# EAGLE board Tock (EAGLE 7.2.0)
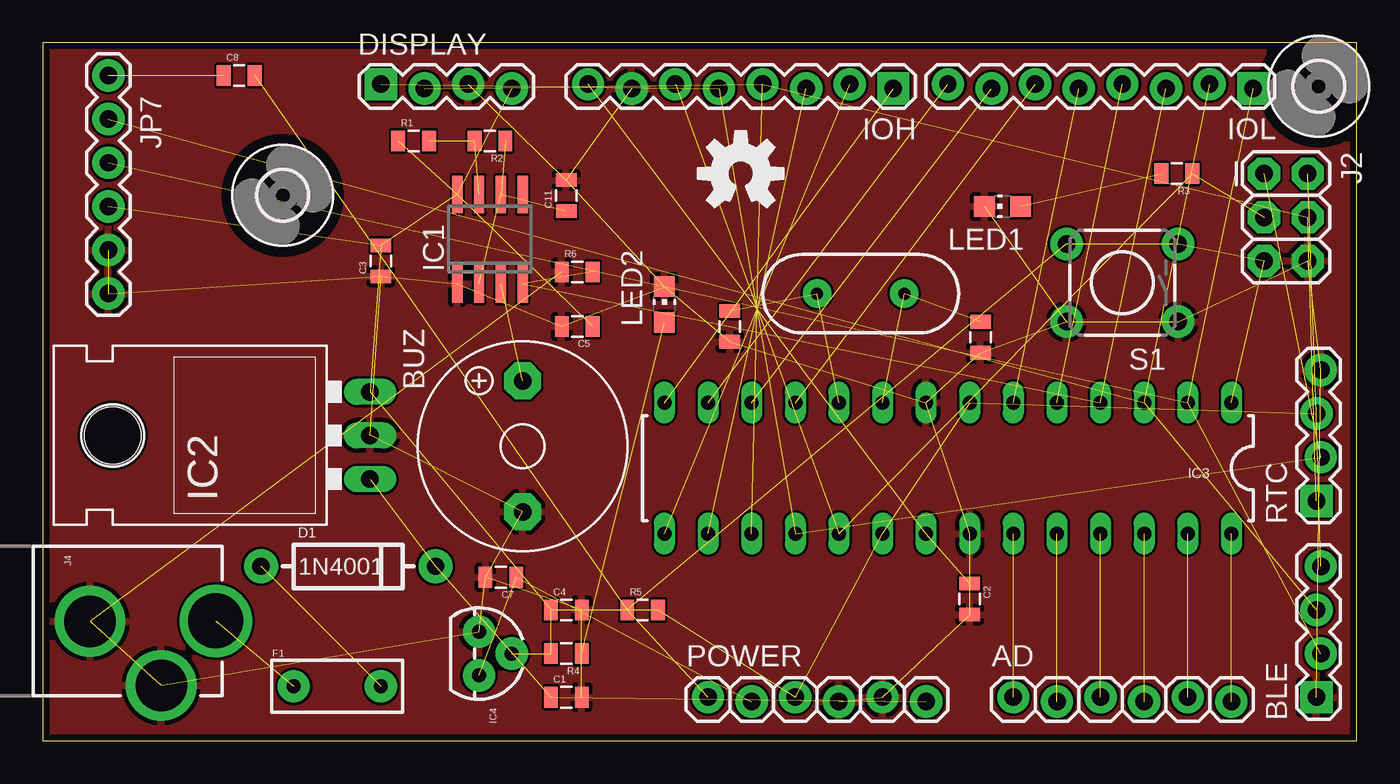
[diagram p0: board, top side]
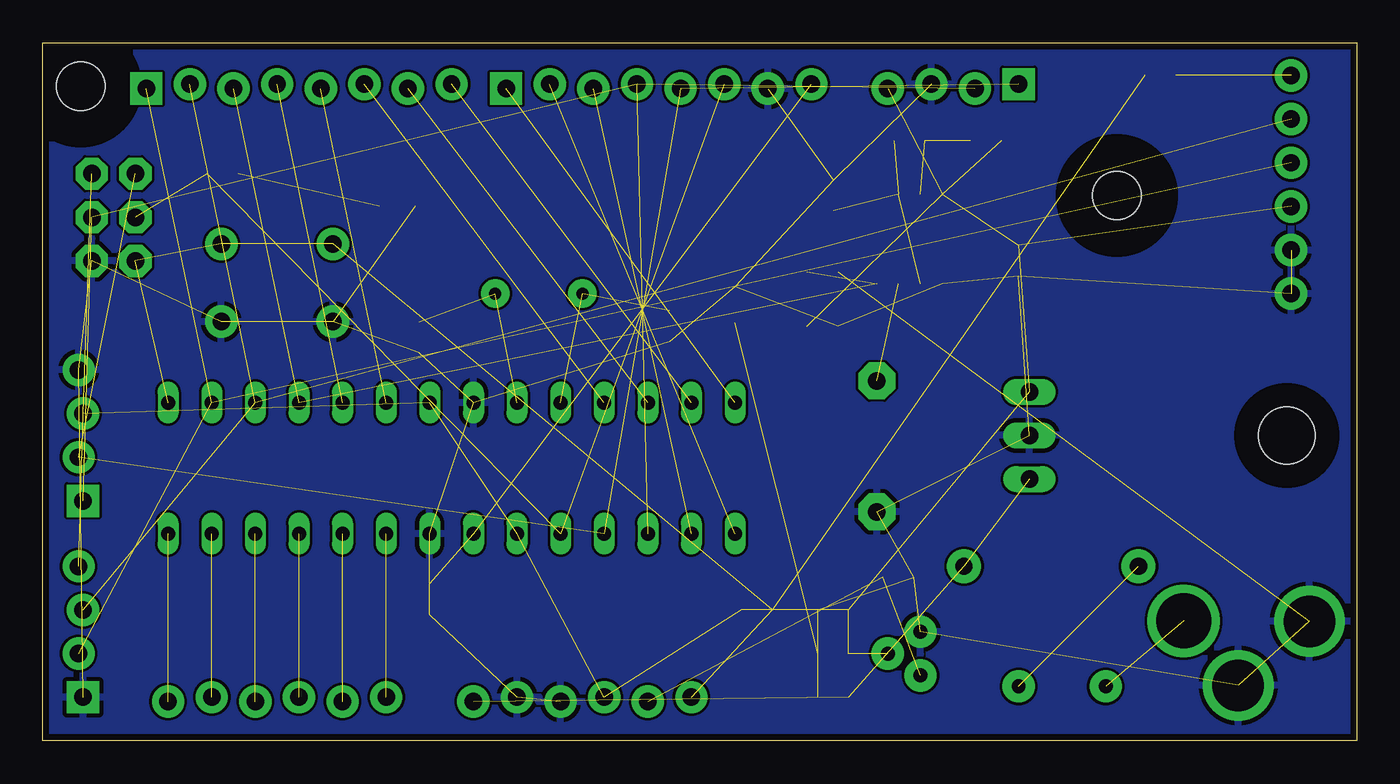
[diagram p1: board, bottom side, seen from below]

Size 76.5 x 40.63 mm. Coordinates in mm from the lower left corner, seen from the top.
Outline: 0,0 76.5,0 76.5,40.63 0,40.63 0,0
Copper layers (1*16): Top 0.0356mm / dielectric 1.5011mm / Bottom 0.0356mm
Design rules "LaenPCBOrder": minimum track width 6mil, minimum drill 13mil, track to track 6mil, track to pad 6mil, pad to pad 6mil, via to via 6mil, smd to smd 6mil, copper to edge 15mil, drill to drill 6mil, minimum pad ring 7mil, minimum via ring 7mil, stop-mask expansion 3mil, vias tented up to drill 0mil, thermal gap 10mil
Net classes: 0 default: width 0.203 mm, drill 0.305 mm, clearance 0.152 mm; 1 power: width 1.016 mm, drill 0.305 mm, clearance 0.152 mm; 2 outpin: width 0.203 mm, drill 0.305 mm, clearance 0.152 mm

## Footprints (pad centres in the part's own frame; a part is rotated, then mirrored left to right if it is on the bottom)
1X06_LOCK = drill 1.016 pad 1.88: 1 0,0; 2 2.54,-0.254; 3 5.08,0; 4 7.62,-0.254; 5 10.16,0; 6 12.7,-0.254
1X04_LOCK = drill 1.016 pad 1.88 square: 1 0,0.127 | drill 1.016 pad 1.88: 2 2.54,-0.127; 3 5.08,0.127; 4 7.62,-0.127
F/TMB = drill 1.016 pad 2.159 octagon: + 3.81,0; - -3.81,0
0805 = smd 0.8 x 1.2: 1 -0.9,0; 2 0.9,0
DIODE-1N4001 = drill 1 pad 1.981: A -5.08,0; C 5.08,0
PTC = drill 0.8 pad 1.88: P$1 -2.54,0; P$2 2.54,0
SO08 = smd 0.6 x 2.2: 1 -1.905,-2.6; 2 -0.635,-2.6; 3 0.635,-2.6; 4 1.905,-2.6; 5 1.905,2.6; 6 0.635,2.6; 7 -0.635,2.6; 8 -1.905,2.6
TO-220-ALT = drill 1.016 long: GND 0,-3.81; IN -2.54,-3.81; OUT 2.54,-3.81 | hole 3.302: 0,11.176
DIL28-3 = drill 0.813 long: 1 -16.51,-3.81; 2 -13.97,-3.81; 3 -11.43,-3.81; 4 -8.89,-3.81; 5 -6.35,-3.81; 6 -3.81,-3.81; 7 -1.27,-3.81; 8 1.27,-3.81; 9 3.81,-3.81; 10 6.35,-3.81; 11 8.89,-3.81; 12 11.43,-3.81; 13 13.97,-3.81; 14 16.51,-3.81; 15 16.51,3.81; 16 13.97,3.81; 17 11.43,3.81; 18 8.89,3.81; 19 6.35,3.81; 20 3.81,3.81; 21 1.27,3.81; 22 -1.27,3.81; 23 -3.81,3.81; 24 -6.35,3.81; 25 -8.89,3.81; 26 -11.43,3.81; 27 -13.97,3.81; 28 -16.51,3.81
TO-92 = drill 0.813 pad 1.88: 1 -1.27,0; 2 0,1.905; 3 1.27,0
1X08_LOCK = drill 1.016 pad 1.88 square: 1 0,0.127 | drill 1.016 pad 1.88: 2 2.54,-0.127; 3 5.08,0.127; 4 7.62,-0.127; 5 10.16,0.127; 6 12.7,-0.127; 7 15.24,0.127; 8 17.78,-0.127
2X3 = drill 1.016 pad 1.88 octagon: 1 0,0; 2 0,2.54; 3 2.54,0; 4 2.54,2.54; 5 5.08,0; 6 5.08,2.54
POWER_JACK_PTH_LOCK = drill 2.997 pad 4.115: GND 0.025,6.557; GNDBREAK 3.762,10.7 | drill 3.2 pad 4.115: PWR 0,13.878
FTDI_BASIC = drill 1.016 pad 1.88: CTS 10.16,0; DTR 0,0; GND 12.7,0; RXI 2.54,0; TXO 5.08,0; VCC 7.62,0
CHIP-LED0805 = smd 1.2 x 1.2: A 0,-1.05; C 0,1.05
TACTILE-PTH = drill 1.016 pad 1.88: 1 -3.251,2.261; 2 3.251,2.261; 3 -3.251,-2.261; 4 3.251,-2.261
2,8 = hole 2.8: 0,0
HC49US = drill 0.7 pad 1.651: 1 -2.54,0; 2 2.54,0

## Placement (x,y rotation side)
AD  [1X06_LOCK]  56.52,2.54 0 top
BLE  [1X04_LOCK]  74.3,2.54 90 top
BUZ  F/TMB  [F/TMB]  27.94,17.14 90 top
C1  10uf  [0805]  30.48,2.54 0 top
C2  0.1uF  [0805]  53.97,8.26 270 top
C3  0.1uF  [0805]  19.68,27.94 90 top
C4  10uf  [0805]  30.48,7.62 0 top
C5  0.1uF  [0805]  31.11,24.13 180 top
C7  0.1uF  [0805]  26.67,9.53 180 top
C8  0.1uF  [0805]  11.43,38.73 0 top
C9  22pF  [0805]  54.61,23.5 90 top
C10  22pF  [0805]  40,24.13 90 top
C11  220uf  [0805]  30.48,31.75 90 top
D1  1N4001  [DIODE-1N4001]  17.78,10.16 0 top
DISPLAY  [1X04_LOCK]  19.68,38.1 0 top
F1  PTCPTH  [PTC]  17.14,3.17 0 top
IC1  NE555D  [SO08]  26.04,29.21 0 top
IC2  LM7805  [TO-220-ALT]  15.24,17.78 90 top
IC3  AVR-MEGA8-PPTH  [DIL28-3]  52.7,15.88 180 top
IC4  MCP1700-33  [TO-92]  25.4,5.08 270 top
IOH  [1X08_LOCK]  49.53,38.1 180 top
IOL  [1X08_LOCK]  70.48,38.1 180 top
J2  ISP  [2X3]  71.12,33.02 270 top
J4  VIN  [POWER_JACK_PTH_LOCK]  -3.81,6.99 270 top
JP7  FTDI_BASICPTH  [FTDI_BASIC]  3.81,38.73 270 top
LED1  RED  [CHIP-LED0805]  55.88,31.11 90 top
LED2  GREEN  [CHIP-LED0805]  36.19,25.4 0 top
POWER  [1X06_LOCK]  38.73,2.54 0 top
R1  1K  [0805]  21.59,34.92 0 top
R2  600  [0805]  26.04,34.92 180 top
R3  330  [0805]  66.04,33.02 180 top
R4  330  [0805]  30.48,5.08 180 top
R5  10k  [0805]  34.92,7.62 0 top
R6  10K  [0805]  31.11,27.3 0 top
RTC  [1X04_LOCK]  74.3,13.97 90 top
S1  RESET  [TACTILE-PTH]  62.86,26.67 180 top
U$7  OSHW-LOGOM  [OSHW-LOGO-M]  40.64,33.02 0 top
U$8  [2,8]  74.3,38.1 0 top
U$10  [2,8]  13.97,31.75 0 top
Y1  16MHz  [HC49US]  47.62,26.04 0 top

## Library data of the parts
AD BLE DISPLAY IOH IOL POWER RTC = SparkFun-Connectors
BUZ = buzzer; OC_FARNELL: unknown; OC_NEWARK: unknown
C1 C2 C4 C5 C7-C11 = SparkFun-Passives
C3 = SparkFun-Capacitors; PROD_ID: CAP-11625; VALUE: 1.0uF
D1 F1 IC2-IC4 J2 J4 JP7 S1 U$7 Y1 = SparkFun
IC1 = linear
LED1 LED2 = led
R1-R5 = SparkFun-Resistors
R6 = SparkFun-Resistors; PROD_ID: RES-11622
U$8 U$10 = holes

## Nets
3.3V: C7.1 IC4.3 POWER.2
5V [power]: BLE.4 C3.2 C4.1 C5.1 DISPLAY.4 IC1.8 IC2.OUT IC3.7 IC3.20 IC4.2 J2.2 JP7.VCC POWER.3 R1.1 R4.2 R5.2 RTC.3
555RST: IC1.4 IC3.4 IOL.3 R6.2
AD0 [outpin]: AD.1 IC3.23
AD1 [outpin]: AD.2 IC3.24
AD2 [outpin]: AD.3 IC3.25
AD3 [outpin]: AD.4 IC3.26
AD4 [outpin]: AD.5 IC3.27
AD5 [outpin]: AD.6 IC3.28
AREF [outpin]: C2.1 IC3.21 IOH.8
DTR: C8.1 JP7.DTR
GND [power]: BLE.1 BUZ.- C1.2 C2.2 C3.1 C4.2 C5.2 C7.2 C9.1 C10.1 C11.2 DISPLAY.3 IC1.1 IC2.GND IC3.8 IC3.22 IC4.1 IOH.7 J2.6 J4.GND J4.GNDBREAK JP7.CTS JP7.GND LED1.C LED2.C POWER.4 POWER.5 R6.1 RTC.4 S1.1 S1.2
IO3 [outpin]: IC3.5 IOL.4
IO4 [outpin]: IC3.6 IOL.5
IO5 [outpin]: IC3.11 IOL.6
IO6 [outpin]: IC3.12 IOL.7
IO7 [outpin]: IC3.13 IOL.8
IO8 [outpin]: IC3.14 IOH.1
IO9 [outpin]: IC3.15 IOH.2
MISO [outpin]: DISPLAY.1 IC3.18 IOH.5 J2.1 RTC.2
MOSI: DISPLAY.2 IC3.17 IOH.4 J2.4 RTC.1
N$1: LED1.A R3.2
N$2: LED2.A R4.1
N$3: C9.2 IC3.9 Y1.2
N$4: C10.2 IC3.10 Y1.1
N$5: C11.1 IC1.2 IC1.6 R2.1
N$6: D1.A F1.P$2
N$7: BUZ.+ IC1.3
N$9: IC1.7 R1.2 R2.2
RAW [power]: F1.P$1 J4.PWR
RESET: C8.2 IC3.1 J2.5 POWER.1 R5.1 S1.3 S1.4
RX-I [outpin]: BLE.2 IC3.2 IOL.1 JP7.TXO
SCK [outpin]: IC3.19 IOH.6 J2.3 R3.1
SS [outpin]: IC3.16 IOH.3
TX-O [outpin]: BLE.3 IC3.3 IOL.2 JP7.RXI
VIN [power]: C1.1 D1.C IC2.IN POWER.6

## Tracks (layer width: path | path; a pad name or v marks a point on that pad's centre or on a via)
3.3V  (2 unrouted)
5V  (16 unrouted)
555RST  (3 unrouted)
AD0  (1 unrouted)
AD1  (1 unrouted)
AD2  (1 unrouted)
AD3  (1 unrouted)
AD4  (1 unrouted)
AD5  (1 unrouted)
AREF  (2 unrouted)
DTR  (1 unrouted)
GND  (30 unrouted)
  pour Top: 0,41.27 0,0 77.47,0 77.47,41.27
  pour Bottom: 0,41.27 0,0 77.47,0 77.47,41.27
IO3  (1 unrouted)
IO4  (1 unrouted)
IO5  (1 unrouted)
IO6  (1 unrouted)
IO7  (1 unrouted)
IO8  (1 unrouted)
IO9  (1 unrouted)
MISO  (4 unrouted)
MOSI  (4 unrouted)
N$1  (1 unrouted)
N$2  (1 unrouted)
N$3  (2 unrouted)
N$4  (2 unrouted)
N$5  (3 unrouted)
N$6  (1 unrouted)
N$7  (1 unrouted)
N$9  (2 unrouted)
RAW  (1 unrouted)
RESET  (6 unrouted)
RX-I  (3 unrouted)
SCK  (3 unrouted)
SS  (1 unrouted)
TX-O  (3 unrouted)
VIN  (3 unrouted)